# EAGLE board power demo board (EAGLE 5.06)

Size 224.77 x 61.9 mm. Coordinates in mm from the lower left corner, seen from the top.
Outline: 0,0 224.77,0 224.77,61.9 0,61.9 0,0
Copper layers (1*16): Top 0.035mm / dielectric 1.5mm / Bottom 0.035mm
Design rules "default": minimum track width 10mil, minimum drill 24mil, track to track 8mil, track to pad 8mil, pad to pad 8mil, via to via 8mil, smd to smd 8mil, copper to edge 40mil, drill to drill 8mil, minimum pad ring 10mil, minimum via ring 8mil, stop-mask expansion 4mil, vias tented up to drill 0mil, thermal gap 10mil

## Footprints (pad centres in the part's own frame; a part is rotated, then mirrored left to right if it is on the bottom)
SO08 = smd 0.6 x 2.2: 1 -1.905,-2.6; 2 -0.635,-2.6; 3 0.635,-2.6; 4 1.905,-2.6; 5 1.905,2.6; 6 0.635,2.6; 7 -0.635,2.6; 8 -1.905,2.6
SO14 = smd 0.533 x 1.981: 1 -3.81,-2.219; 2 -2.54,-2.219; 3 -1.27,-2.219; 4 0,-2.219; 5 1.27,-2.219; 6 2.54,-2.219; 7 3.81,-2.219; 8 3.81,2.6; 9 2.54,2.6; 10 1.27,2.6; 11 0,2.6; 12 -1.27,2.6; 13 -2.54,2.6; 14 -3.81,2.6
UMAX10 = smd 0.28 x 1.4: 1 -1,-2; 2 -0.5,-2; 3 0,-2; 4 0.5,-2; 5 1,-2; 6 1,2.5; 7 0.5,2.5; 8 0,2.5; 9 -0.5,2.5; 10 -1,2.5
TO220-W/657-20ABP = drill 1.118 long: 1 -2.54,-2.54; 2 0,-2.54; 3 2.54,-2.54 | drill 2.8 pad 6.452 round: P$1 -12.7,0; P$2 12.7,0 | hole 3.302: 0,11.176
0207/10 = drill 0.813 octagon: 1 -5.08,0; 2 5.08,0
630HR050E = drill 1.3 pad 2.54 square: P$1 -6.35,0; P$2 6.35,0

## Placement (x,y rotation side)
IC1  AD8210D  [SO08]  5.08,45.72 90 top
IC2  AD8210D  [SO08]  33.02,45.72 90 top
IC3  AD8210D  [SO08]  60.96,45.72 90 top
IC4  AD8210D  [SO08]  88.9,45.72 90 top
IC5  [SO14]  88.9,54.61 270 top
IC6  [SO14]  33.02,54.61 270 top
IC7  MAX4233  [UMAX10]  140.97,46.99 270 top
IC8  MAX4233  [UMAX10]  196.85,46.99 270 top
Q1  RFP12N10L  [TO220-W/657-20ABP]  15.24,21.59 90 top
Q2  RFP12N10L  [TO220-W/657-20ABP]  43.18,21.59 90 top
Q3  RFP12N10L  [TO220-W/657-20ABP]  71.12,21.59 90 top
Q4  RFP12N10L  [TO220-W/657-20ABP]  99.06,21.59 90 top
Q5  RFP12N10L  [TO220-W/657-20ABP]  127,21.59 90 top
Q6  RFP12N10L  [TO220-W/657-20ABP]  154.94,21.59 90 top
Q7  RFP12N10L  [TO220-W/657-20ABP]  182.88,21.59 90 top
Q8  RFP12N10L  [TO220-W/657-20ABP]  210.82,21.59 90 top
R1  50  [0207/10]  53.34,21.59 90 top
R2  50  [0207/10]  25.4,21.59 90 top
R3  50  [0207/10]  109.22,21.59 90 top
R4  50  [0207/10]  81.28,21.59 90 top
R5  50  [0207/10]  137.16,21.59 90 top
R6  50  [0207/10]  165.1,21.59 90 top
R7  50  [0207/10]  193.04,21.59 90 top
R8  50  [0207/10]  220.98,21.59 90 top
U$1  630HR050E  [630HR050E]  116.84,21.59 90 top
U$2  630HR050E  [630HR050E]  144.78,21.59 90 top
U$3  630HR050E  [630HR050E]  172.72,21.59 90 top
U$4  630HR050E  [630HR050E]  200.66,21.59 90 top
U$5  630HR050E  [630HR050E]  5.08,21.59 270 top
U$6  630HR050E  [630HR050E]  33.02,21.59 270 top
U$7  630HR050E  [630HR050E]  60.96,21.59 270 top
U$8  630HR050E  [630HR050E]  88.9,21.59 270 top

## Library data of the parts
IC1-IC8 Q1-Q8 U$1-U$8 = NEWPARTS
R1-R8 = rcl

## Nets
N$1: IC5.13 R3.2
N$2: IC1.1 Q1.2 U$5.P$1
N$3: IC2.1 Q2.2 U$6.P$1
N$4: IC3.1 Q3.2 U$7.P$1
N$5: IC7.3 IC7.7 IC8.3 IC8.4 IC8.7
N$6: IC5.4 IC6.4 Q1.3 Q2.3 Q3.3 Q4.3
N$7: IC7.2 Q5.3 U$1.P$2
N$8: IC7.8 Q6.3 U$2.P$2
N$9: IC8.2 Q7.3 U$3.P$2
N$10: IC8.8 Q8.3 U$4.P$2
N$11: IC5.14 IC6.14 Q5.2 Q6.2 Q7.2 Q8.2
N$12: IC7.1 R5.2
N$13: Q5.1 R5.1
N$14: IC7.9 R6.2
N$15: Q6.1 R6.1
N$16: Q7.1 R7.1
N$17: IC8.1 R7.2
N$18: Q8.1 R8.1
N$19: IC8.9 R8.2
N$20: IC7.5 IC7.6 IC8.5 IC8.6
N$21: IC4.1 Q4.2 U$8.P$1
N$22: IC5.6 IC5.9 IC6.6 IC6.9
N$23: IC6.13 R1.2
N$24: Q1.1 R2.1
N$25: Q2.1 R1.1
N$26: Q3.1 R4.1
N$27: Q4.1 R3.1
N$28: IC5.1 R4.2
N$29: IC2.5 IC6.12
N$31: IC5.3 IC5.11 IC6.3 IC6.11
N$32: IC1.5 IC6.2
N$33: IC6.1 R2.2
N$34: IC4.5 IC5.12
N$35: IC3.5 IC5.2
N$36: IC1.2 IC1.3 IC1.7 IC1.8 IC2.2 IC2.3 IC2.7 IC2.8 IC3.2 IC3.3 IC3.7 IC3.8 IC4.2 IC4.3 IC4.7 IC4.8 IC7.4 U$1.P$1 U$2.P$1 U$3.P$1 U$4.P$1 U$5.P$2 U$6.P$2 U$7.P$2 U$8.P$2
N$40: IC1.6 IC2.6 IC3.6 IC4.6 IC7.10 IC8.10
NC: IC1.4 IC2.4 IC3.4 IC4.4
NC2: IC5.8 IC6.8

## Tracks (layer width: path | path; a pad name or v marks a point on that pad's centre or on a via)
N$1  (1 unrouted)
N$2  (2 unrouted)
N$3  (2 unrouted)
N$4  (2 unrouted)
N$5  (4 unrouted)
N$6  (5 unrouted)
N$7  (2 unrouted)
N$8  (2 unrouted)
N$9  (2 unrouted)
N$10  (2 unrouted)
N$11  (5 unrouted)
N$12  (1 unrouted)
N$13  (1 unrouted)
N$14  (1 unrouted)
N$15  (1 unrouted)
N$16  (1 unrouted)
N$17  (1 unrouted)
N$18  (1 unrouted)
N$19  (1 unrouted)
N$20  (3 unrouted)
N$21  (2 unrouted)
N$22  (3 unrouted)
N$23  (1 unrouted)
N$24  (1 unrouted)
N$25  (1 unrouted)
N$26  (1 unrouted)
N$27  (1 unrouted)
N$28  (1 unrouted)
N$29  (1 unrouted)
N$31  (3 unrouted)
N$32  (1 unrouted)
N$33  (1 unrouted)
N$34  (1 unrouted)
N$35  (1 unrouted)
N$36  (24 unrouted)
N$40  (5 unrouted)
NC  (3 unrouted)
NC2  (1 unrouted)